# Altium PCB UKU202045.PcbDoc (part 3 of 3)
Units mm, origin at the board's own origin, x right, y up, seen from the top; angles counter-clockwise.
Board outline 319.2 x 161.95 mm, 2 copper layers (Top Layer, Bottom Layer); 290 components, 381 nets, 912 pads, 545 vias.
Unrouted connection lines stored in the file: 1.
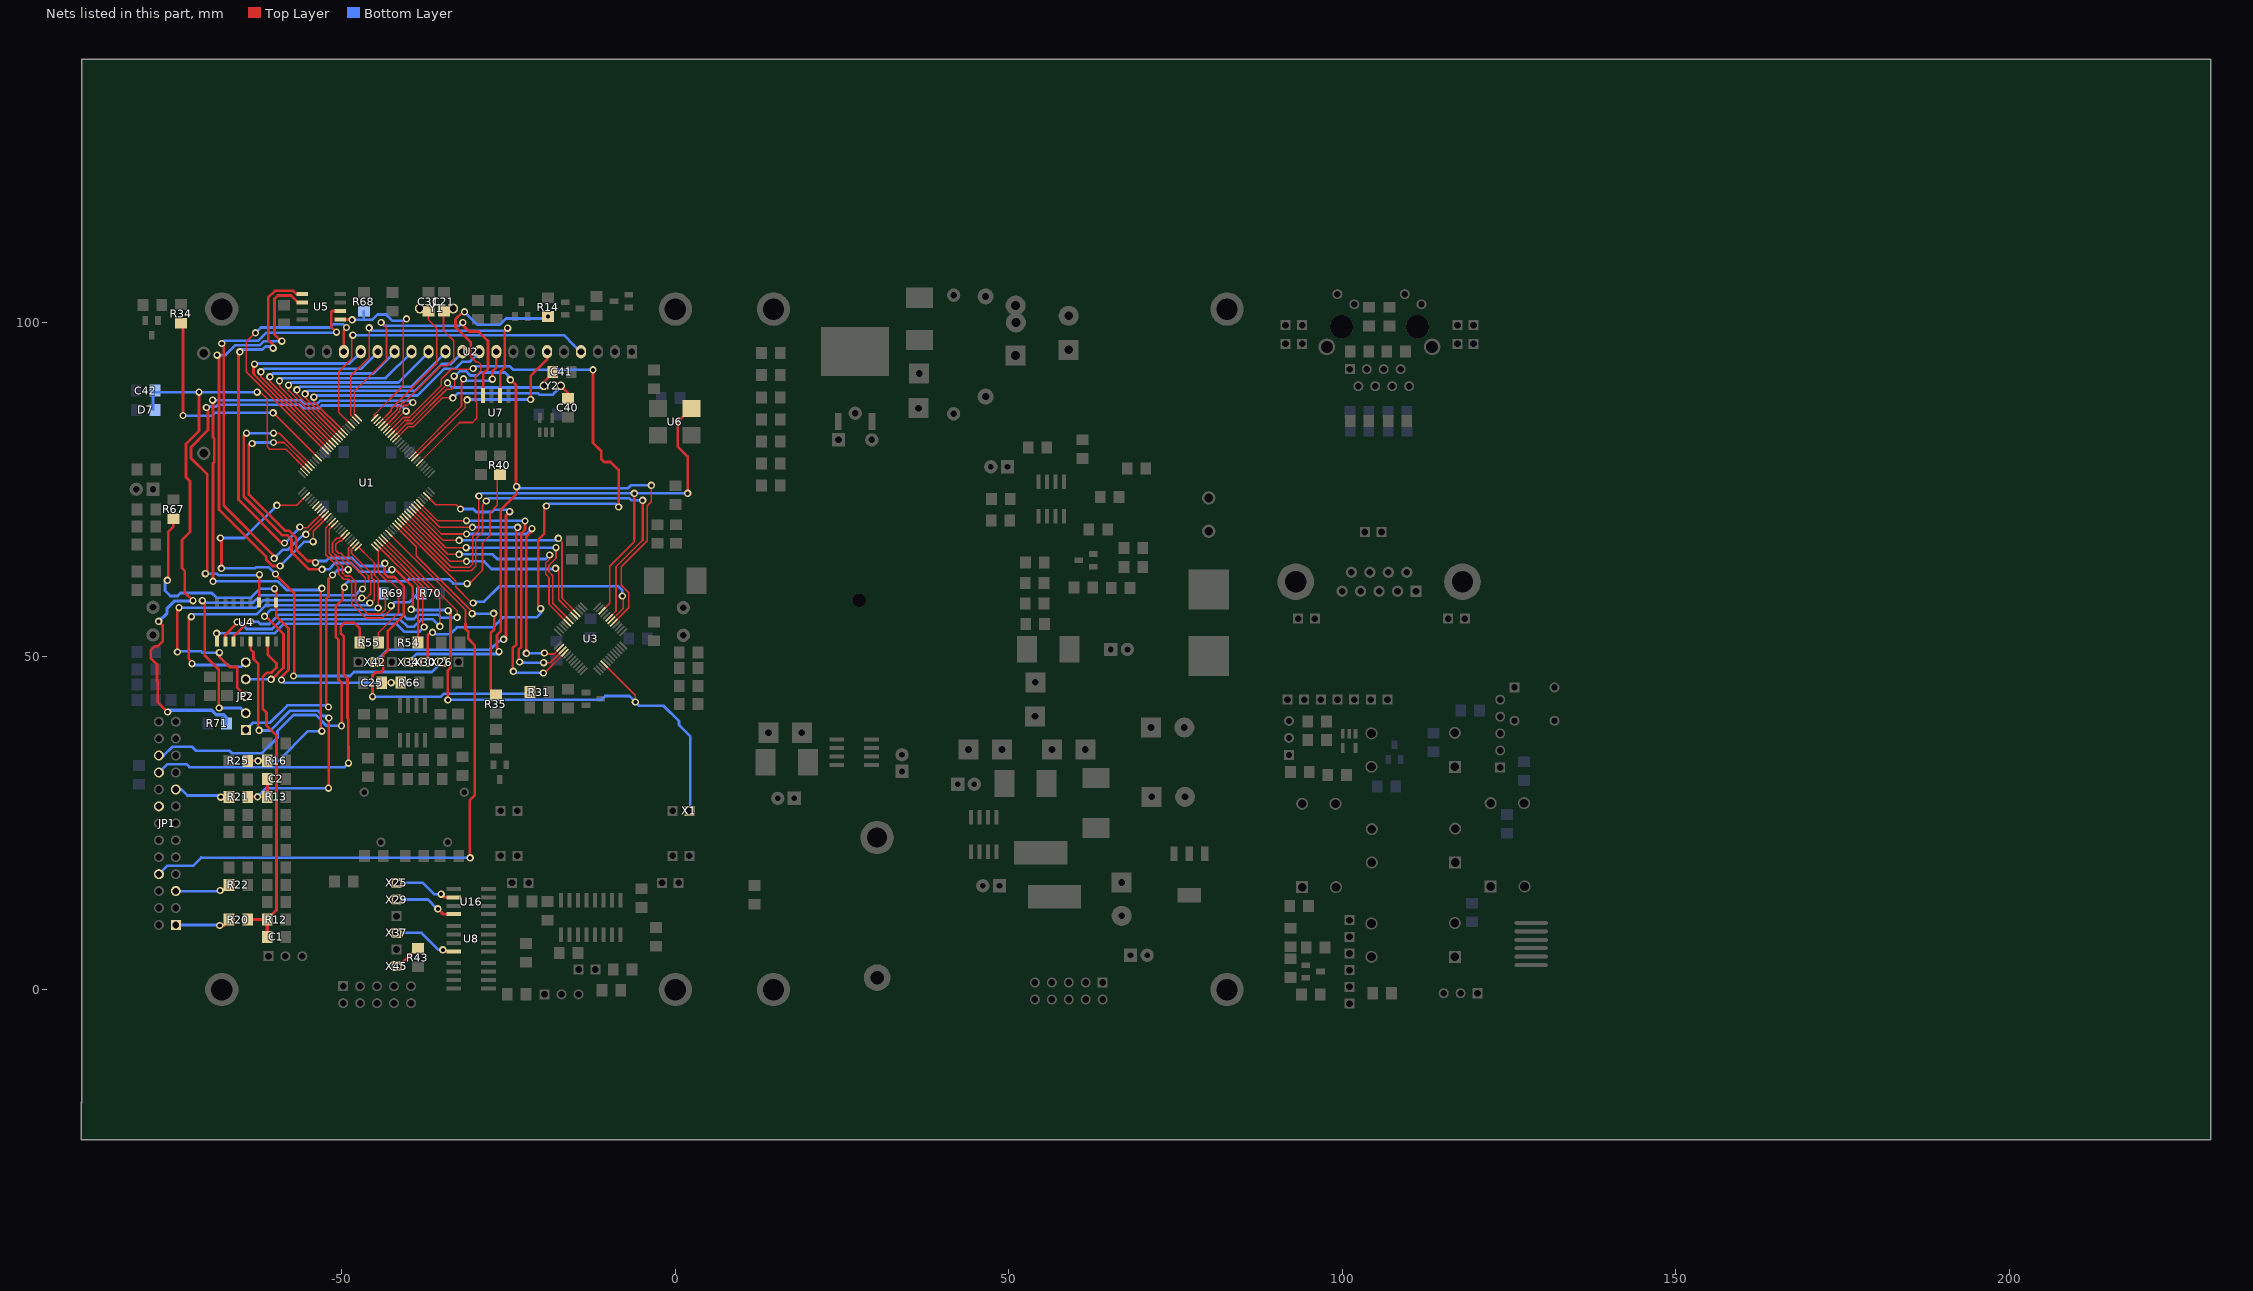
[diagram p3: the nets of this part, all layers, seen from the top]

## Via types
v1: diameter 1.1, hole 0.6, Top Layer to Bottom Layer, 521 vias
v2: diameter 1.2, hole 0.7, Top Layer to Bottom Layer, 12 vias
v3: diameter 1.5, hole 0.95, Top Layer to Bottom Layer, 12 vias

## Nets (pads, with @x,y where several pads share a name; then routed paths per layer and width w, separated by ;. In a path a pad name is that pad's centre, name@x,y a point inside that pad or via, vN(x,y) a via of type N, cw(c..) or ccw(c..) an arc to the next point about the centre after c; other vN are vias at no path point) (continued)
OFF2: JP1.20 R55.2 | length 55.9
  Top Layer w0.4: v1(-49,33.95) -49,36.5 -49.05,36.55 -49.05,40.6 -49.15,40.7 -49.15,46.6 -49.7,47.15 -49.7,52.9 -50.15,53.35 -50.15,54.45 -49.6,55 -48.15,55 -47.291,54.141 R55.2@-47.291,52.004
  Bottom Layer w0.4: JP1.20@-77.42,32.545 -76.165,33.8 -73.3,33.8 -72.85,33.35 -49.6,33.35 v1(-49,33.95)
P0_0: 
P0_0: U1.46 U3.16 X1.1 | length 135.4
  Top Layer w0.25: v1(-60.25,83.4) -59.357,83.4 U1.46@-54.608,78.652 ; U3.16@-10.643,48.751 -6,44.108 v1(-6,43.1)
  Top Layer w0.4: v1(-64.3,83.4) -64.7,83 -64.7,73.9 -58.9,68.1 -58.15,68.1 -57.55,67.5 -57.55,65.6 -54.95,63 v1(-52.95,63) ; -57.397,65.448 -57.393,65.444 ; v1(-42.5,62.95) -41.95,62.95 -39.35,60.35 -39.35,57.4 -39.5,57.25 v1@-39.6,57.25 ; v1(-34.1,43.4) -34.1,47.85 -33.7,48.25 -33.7,56.45 v1(-34.05,56.8)
  Bottom Layer w0.4: v1(-64.3,83.4) v1(-60.25,83.4) ; v1(-52.95,63) -51.95,63 -51,63.95 -48.65,63.95 -47.35,62.65 -42.8,62.65 v1(-42.5,62.95) ; v1@-39.6,57.25 -39.475,57.125 -39.25,56.9 -34.15,56.9 v1(-34.05,56.8) ; v1(-34.1,43.4) -34.05,43.45 -11.05,43.45 -10.5,44 -6.9,44 v1(-6,43.1) -5.45,42.55 -1.75,42.55 0.55,40.25 0.55,39.65 2.25,37.95 2.25,27.05 2.05,26.85 X1.1@2,26.8
  other v1: -39.6,57
P0_1: R31.2 U1.47 | length 92.7
  Top Layer w0.25: v1(-60.25,82) -58.664,82 U1.47@-54.962,78.298
  Top Layer w0.4: v1@-63.75,81.85 -63.95,81.65 -63.95,74.2 -58.55,68.8 -57.9,68.8 -56.85,67.75 -56.85,65.95 -55.15,64.25 -54.2,64.25 v1(-53.95,64) ; v1(-45.4,43.9) -45.4,47.1 -44.95,47.55 -44.15,47.55 -43.8,47.9 -43.8,50.15 -43.1,50.85 -43.1,53.75 -40.7,56.15 -40.7,60.45 -42.1,61.85 -43.05,61.85 -43.599,62.399 -43.599,63.851 v1(-43.55,63.9)
  Bottom Layer w0.4: v1@-63.75,81.85 -63.6,82 -63.45,82 v1(-60.25,82) ; v1(-53.95,64) -53.7,64.25 -52.35,64.25 -51.9,64.7 -48.45,64.7 -47.25,63.5 -43.95,63.5 v1(-43.55,63.9) ; v1(-45.4,43.9) -35.15,43.9 -34.7,44.35 -22.1,44.35 v1(-21.9,44.55)
  other v1: -63.45,81.85
P0_2: U1.98 X42.1 | length 53.9
  Top Layer w0.25: U1.98@-37.25,74.05 -35.9,72.7 -32.85,72.7 v1(-32.2,72.05)
  Top Layer w0.4: v1(-25.75,52.5) -25.4,52.85 -25.4,71.1 v1(-24.85,71.65)
  Bottom Layer w0.4: X42.1@-45,49.1 -43.15,50.95 -27.75,50.95 -26.45,52.25 -26.3,52.25 -26.05,52.5 v1(-25.75,52.5) ; v1(-32.2,72.05) -30.3,72.05 -29.85,71.6 -27.5,71.6 -27.15,71.95 -25.15,71.95 v1(-24.85,71.65)
P0_3: U1.99 X22.1 | length 47.5
  Top Layer w0.25: U1.99@-36.931,74.409 -35.722,73.2 v1(-30.9,73.2)
  Top Layer w0.4: v1(-25.5,49.05) -25.25,49.3 -25.25,51.5 -24.65,52.1 -24.65,70.4 v1(-22.45,72.6)
  Bottom Layer w0.4: v1(-30.9,73.2) -30.35,73.2 -29.35,72.2 -27.85,72.2 -27.35,72.7 -22.55,72.7 v1(-22.45,72.6)
  Bottom Layer w0.5: X22.1@-32.5,49.1 -25.55,49.1 v1(-25.5,49.05)
P0_3: 
P0_4: 
P0_5: U1.80 U4.11 | length 53
  Top Layer w0.25: U1.80@-43.648,67.691 -33.253,57.297 ; -33.25,57.3 -32.7,56.75 v1(-32.7,55.8)
  Top Layer w0.4: U4.11@-66.205,52.175 -66.205,52.945 -64.2,54.95 -63.899,54.95 v1(-63.699,55.15)
  Bottom Layer w0.4: v1(-63.699,55.15) -62.6,55.15 -62.25,54.8 -60.85,54.8 -59.45,56.2 -40.85,56.2 -40.2,55.55 -39.2,55.55 -38.55,56.2 -35.6,56.2 -35.15,55.75 v1@-32.8,55.75
P0_6: U1.79 U4.10 | length 52.9
  Top Layer w0.25: U1.79@-43.966,67.338 -35.3,58.671 v1(-35.3,54.45)
  Top Layer w0.4: U4.10@-67.475,52.175 -67.475,53.175 -65.7,54.95 v1(-65.7,55.1)
  Bottom Layer w0.4: v1(-65.7,55.1) -65.3,55.1 -64.25,54.05 ; -64.25,54.05 -60.45,54.05 -59,55.5 -41.25,55.5 -40.15,54.4 -39.15,54.4 -38.05,55.5 -36.35,55.5 v1(-35.3,54.45)
P0_7: U1.78 U4.9 | length 49.2
  Top Layer w0.25: U1.78@-44.355,66.984 -37.85,60.479 -37.85,54.55 v1(-37.65,54.35)
  Top Layer w0.4: U4.9@-68.75,52.1 -68.75,52.175 v1(-68.75,53.4)
  Bottom Layer w0.4: v1(-68.75,53.4) -60.1,53.4 -58.65,54.85 -41.85,54.85 -40.65,53.65 -38.35,53.65 v1(-37.65,54.35)
P0_8: R54.1 U1.77 | length 17.2
  Top Layer w0.25: U1.77@-44.709,66.631 -38.591,60.513 R54.1@-38.591,52.004
P0_9: R55.1 U1.76 | length 17.4
  Top Layer w0.25: U1.76@-45.062,66.277 -44.55,65.765 -44.55,62.55 -43.196,61.196 -42.696,61.196 -41.5,60 -41.5,56.5 -44.55,53.45 -44.55,52.004 R55.1@-44.55,51.95
P0_10: C42.1 D7.2 R71.2 U1.48 | length 101.2
  Top Layer w0.25: v1(-62.7,89.55) -62.2,89.55 -61.2,88.55 -61.2,81.4 -60.8,81 -58.371,81 U1.48@-55.315,77.944
  Top Layer w0.4: v1(-77.45,55.2) -76.85,54.6 -76.85,52.2 -77.6,51.45 -78.05,51.45 -78.65,50.85 -78.65,49.7 -77.7,48.75 -77.7,46.3 -77.6,46.2 -77.6,43.1 v1(-76.1,41.6) ; v1(-72.3,58.3) -73.55,59.55 -73.55,62.8 -73.95,63.2 -73.95,67.4 -72.75,68.6 -72.75,76.2 -73.35,76.8 -73.35,81.8 -71.4,83.75 v1(-71.4,89.55)
  Bottom Layer w0.4: D7.2@-78.25,86.95 -78.3,87 -78.3,89.6 -78.253,89.553 -78.25,89.55 -78.003,89.55 v1(-71.4,89.55) v1(-62.7,89.55)
  Bottom Layer w0.5: v1(-77.45,55.2) -76.2,56.45 -76.2,57.2 -75.15,58.25 -72.35,58.25 v1(-72.3,58.3) ; v1(-76.1,41.6) -75.85,41.85 -69.5,41.85 -68.85,41.2 -67.7,41.2 -67.297,40.797 R71.2@-67.297,39.897
P0_11: U1.49
P0_12: 
P0_13: 
P0_14: 
P0_15: U1.62 U5.6 | length 69.7
  Top Layer w0.25: v1(-54.3,67.15) -54.3,68.7 U1.62@-52.13,70.87
  Top Layer w0.4: v1(-68.7,95.1) -68.4,94.8 -68.4,85.25 ; -68.45,85.25 -68.4,85.25 ; -60.1,98.2 -59.1,97.2 -59.05,97.2 -59.05,97.15 -59.025,97.175 v1(-59,97.2) ; -60.1,98.25 -60.1,103.55 -59.6,104.05 -57.6,104.05 -56.535,102.985 U5.6@-55.95,102.985 U5.6@-56.015,103.05 ; v1(-59.25,63.5) -60.4,63.5 -61.35,64.45 -61.35,64.9 -64.065,67.615 -68.4,71.95 -68.4,85.25
  Bottom Layer w0.4: v1(-68.7,95.1) -67.45,95.1 -65.95,96.6 -62.3,96.6 -61.7,97.2 v1(-59,97.2) ; v1(-59.25,63.5) -55.6,67.15 v1(-54.3,67.15)
P0_17: U1.61 U5.2 | length 68.5
  Top Layer w0.25: v1(-55.4,68.25) -55.4,68.3 U1.61@-52.5,71.2
  Top Layer w0.4: v1@-67.7,96.95 -67.7,96.85 -67.7,72.55 -60.15,65 v1(-60.15,64.65) ; v1(-50.8,98.55) -51.6,99.35 -51.6,101.6 -51.485,101.715 U5.2@-50.25,101.715
  Bottom Layer w0.4: v1@-68,96.9 -67.65,97.25 -62.55,97.25 -61.35,98.45 -50.9,98.45 v1(-50.8,98.55) ; v1(-60.15,64.65) -58.85,65.95 -58.05,65.95 -55.75,68.25 v1(-55.4,68.25)
  other v1: -68,96.85
P0_18: U1.60 U5.5 | length 59
  Top Layer w0.25: v1@-56.25,69.25 -55.15,69.25 -54.8,69.6 U1.60@-52.83,71.57
  Top Layer w0.4: v1(-65.3,95.6) -65.5,95.4 -65.5,73.45 -58.95,66.9 -58.6,66.9 -58.55,66.9 v1(-58.6,66.95) ; -60.45,96.8 -60.647,96.997 ; v1(-60.3,96.15) -60.3,96.65 -60.647,96.997 ; U5.5@-55.95,104.255 -56.805,104.255 -57.3,104.75 -60.05,104.75 -61.05,103.75 -61.05,97.4 -60.647,96.997
  Bottom Layer w0.4: v1(-65.3,95.6) -64.95,95.95 -61.9,95.95 -61.45,96.4 -60.55,96.4 v1(-60.3,96.15) ; v1(-58.6,66.95) -58.55,66.95 v1@-56.25,69.25
  other v1: -56.3,69.35
P0_19: U1.59
P0_20: U1.58
P0_21: U1.57
P0_22: 
P0_22: 
P0_23: U1.9 U2.9 | length 23.7
  Top Layer w0.25: U1.9@-39.406,80.066 -32.05,87.422 -32.05,91.45 v1@-31.95,91.55
  Top Layer w0.4: v1(-27.45,91.5) -27.45,92.65 -26.843,93.257 U2.9@-26.843,95.631
  Bottom Layer w0.4: v1@-31.95,91.55 -31.85,91.45 -31.65,91.25 -27.7,91.25 v1(-27.45,91.5)
  other v1: -31.75,91.55
P0_24: U1.8 U2.6 | length 29.7
  Top Layer w0.25: U1.8@-39.052,79.712 -31.5,87.264 -31.5,88.1 v1(-31.2,88.4)
  Top Layer w0.4: v1(-21.7,88.45) -21.7,92 -19.223,94.477 U2.6@-19.223,95.631
  Bottom Layer w0.4: v1(-31.2,88.4) -31.15,88.45 v1(-21.7,88.45)
P0_25: C3.1 R15.1 R22.1 U1.7 | length 140.3
  Top Layer w0.25: U1.7@-38.698,79.359 -31.907,86.15 v1(-30.95,86.15)
  Top Layer w0.4: -73.8,51.5 -73.8,51.55 ; v1(-72.75,83.75) -74.25,82.25 -74.25,76.6 -73.55,75.9 -73.55,69.1 -74.65,68 -74.65,62.95 -74.3,62.6 -74.3,59 -73.2,57.9 -73.2,56.8 -73.8,56.2 -73.8,51.55 ; C3.1@-61.2,13.15 -61.197,13.153 R15.1@-61.197,15.703 -61.2,15.7 -64,15.7 -64.053,15.647 -66.05,13.65 -68.75,13.65 -69.4,14.3 -69.4,24.55 -69.2,24.75 -69.2,26.6 -69.45,26.85 -69.45,38.85 -73.45,42.85 -73.45,48.4 -73.65,48.6 -73.65,51.4 -73.775,51.525 -73.8,51.55
  Bottom Layer w0.4: v1(-72.75,83.75) -72,84.5 -68.95,84.5 -68.4,85.05 -61.75,85.05 -61.25,84.55 -59.6,84.55 -58.35,85.8 -52.65,85.8 -52.4,86.05 -42.45,86.05 -41.25,84.85 -39.4,84.85 -38.15,86.1 -31,86.1 v1(-30.95,86.15)
P0_25: 
P0_26: R14.1 U1.6 | length 44
  Top Layer w0.25: U1.6@-38.35,79 U1.6@-38.345,79.005 -32.35,85 -30.4,85 -29.75,85.65 -29.75,88 -29.95,88.2 -29.95,91.95 -29.15,92.75 -29.15,93.7 -29.5,94.05 -29.85,94.05 -30.65,94.85 -30.65,96.5
  Top Layer w0.4: v1(-31.6,101.6) -31.85,101.6 -32.95,100.5 -32.95,99.3 -30.65,97 -30.65,96.5
  Bottom Layer w0.4: v1(-31.6,101.6) -29.65,99.65 -26.35,99.65 -25.4,100.6 -19.381,100.6 v1(-19.093,100.888)
P0_27: 
P0_27: R68.1 U1.25 U5.1 | length 29
  Top Layer w0.25: U1.25@-45.1,85.65 -45.1,85.723 -45.1,86.2 -40.8,90.5 -40.8,100.05 v1(-40.3,100.55)
  Top Layer w0.4: U5.1@-50.25,100.445 -48.495,100.445 v1(-48.45,100.4)
  Bottom Layer w0.4: v1(-48.45,100.4) -46.7,100.4 ; R68.1@-46.697,101.703 -46.7,101.7 -46.7,100.4 ; v1(-40.3,100.55) -40.6,100.25 -42.4,100.25 -43.35,101.2 -44.65,101.2 -45.45,100.4 -46.7,100.4
P0_28: U1.24
P0_29: U1.29 U2.4 | length 50.4
  Top Layer w0.25: U1.29@-48.598,84.662 -50.45,86.514 -50.45,92.6 -48.5,94.55 -48.5,97.95 v1(-48.35,98.1)
  Bottom Layer w0.4: v1(-48.35,98.1) -16.7,98.1 -15.259,96.659 -15.25,96.65 ; -15.265,96.653 -14.193,95.581 U2.4@-14.143,95.531
P0_30: U1.30 U2.5 | length 49.2
  Top Layer w0.25: v1(-51,97.1) -51,86.357 U1.30@-48.951,84.309
  Bottom Layer w0.4: v1(-51,97.1) v1@-50.986,97.087 ; v1@-50.95,97.05 v1@-50.986,97.087 ; U2.5@-16.683,95.531 -16.733,95.581 -18.502,97.35 -47.4,97.35 -47.7,97.05 -49,97.05 -49.4,97.45 -50.623,97.45 v1@-50.986,97.087
P0_30: 
P1_0: U1.95 U3.3 | length 45.8
  Top Layer w0.25: U1.95@-38.345,72.995 -35.65,70.3 v1@-31.35,70.3 ; v1(-19.75,49) -18.773,49 U3.3@-16.901,50.872 U3.3@-16.9,50.873
  Top Layer w0.4: v1(-23.35,49.1) -23.5,49.25 -23.5,50.95 -23.1,51.35 -23.1,68.4 -22.55,68.95 v1(-22.55,70.25)
  Bottom Layer w0.4: v1@-31.35,70.3 v1(-31.3,70.3) -22.6,70.3 v1(-22.55,70.25) ; v1(-23.35,49.1) -23.25,49 v1(-19.75,49)
P1_1: U1.94 U3.4 | length 47.7
  Top Layer w0.25: U1.94@-38.65,72.65 -38.659,72.641 U1.94@-38.663,72.641 -35.322,69.3 v1(-30.4,69.3) ; v1@-24.4,47.8 v1(-24.3,47.7) ; v1(-19.8,47.45) -19.8,47.4 -19.666,47.4 U3.4@-16.547,50.519
  Top Layer w0.4: v1@-24.4,47.8 -24.4,51.2 -23.85,51.75 -23.85,69.1 v1(-23.65,69.3)
  Bottom Layer w0.4: v1(-30.4,69.3) v1(-23.65,69.3) ; v1(-24.3,47.7) -24.3,47.5 -19.85,47.5 v1(-19.8,47.45)
P1_2: 
P1_2: 
P1_3: 
P1_3: 
P1_4: U1.93 U3.2 | length 44.1
  Top Layer w0.25: U1.93@-39.052,72.288 -35.064,68.3 v1(-31.3,68.3) ; v1(-19.65,50.45) -19.5,50.3 -18.18,50.3 U3.2@-17.254,51.226
  Top Layer w0.4: v1(-22.35,50.4) -22.35,67.95 -21.6,68.7 -21.5,68.8 v1(-21.5,69.1)
  Bottom Layer w0.4: v1(-31.3,68.3) -22.3,68.3 v1(-21.5,69.1) ; v1(-22.35,50.4) -19.7,50.4 v1(-19.65,50.45)
P1_5: 
P1_5: 
P1_5: 
P1_6: 
P1_6: 
P1_6: 
P1_7: 
P1_7: 
P1_7: 
P1_8: U1.92 U3.40 | length 36.3
  Top Layer w0.25: U1.92@-39.406,71.934 -34.821,67.35 v1(-32.4,67.35) ; v1(-17.55,67.65) -17,67.1 -17,58.65 -16.75,58.4 ; -16.753,58.397 U3.40@-14.78,56.423
  Bottom Layer w0.4: v1(-32.4,67.35) -17.85,67.35 v1(-17.55,67.65)
P1_9: U1.91 U3.43 | length 36.7
  Top Layer w0.25: U1.91@-39.759,71.581 -34.428,66.25 v1(-31.35,66.25) ; v1(-17.9,66.25) -17.9,64.65 -18.95,63.6 -18.95,62.6 -18.387,62.037 -18.387,57.91 U3.43@-15.84,55.363
  Bottom Layer w0.4: v1(-31.35,66.25) v1(-17.9,66.25)
P1_10: U1.90 U3.44 | length 36.1
  Top Layer w0.25: U1.90@-40.113,71.227 -34.136,65.25 v1(-32.4,65.25) ; v1(-18.85,65.15) -18.85,64.55 -19.45,63.95 -19.45,62.3 -18.933,61.783 -18.933,57.748 U3.44@-16.194,55.009
  Bottom Layer w0.4: v1@-32.45,65.25 v1(-32.4,65.25) -27.4,65.25 -26.7,64.55 -19.45,64.55 v1(-18.85,65.15)
P1_11: 
P1_11: 
P1_12: 
P1_12: 
P1_14: U1.89 U3.41 | length 34.1
  Top Layer w0.25: U1.89@-40.466,70.873 -33.793,64.2 v1(-31.3,64.2) ; v1@-17.9,63.15 -17.5,62.75 -17.5,58.436 U3.41@-15.133,56.07
  Bottom Layer w0.4: v1(-31.3,64.2) -28.7,64.2 -27.55,63.05 -18,63.05 -17.925,63.125 v1@-17.9,63.15
  other v1: -17.95,63.15
P1_15: U1.88 U3.34 U6.3 | length 89.3
  Top Layer w0.25: U1.88@-40.82,70.52 -33.6,63.3 -30.85,63.3 -30.35,63.8 -30.35,67.95 -29.45,68.85 v1(-29.45,74) ; U3.34@-10.997,56.777 -9.85,57.923 -9.85,63.45 -6.15,67.15 -6.15,67.55
  Top Layer w0.4: -6.15,67.55 v1(-6.15,74.4) ; v1(1.85,74.4) 1.85,79.9 0.35,81.4 0.35,85.1 U6.3@2.25,87
  Bottom Layer w0.4: v1(-29.45,74) -29.05,74.4 v1(-6.15,74.4) v1(1.85,74.4)
P1_16: U1.87 U3.31 | length 68.5
  Top Layer w0.25: U1.87@-41.173,70.166 -33.807,62.8 -30.6,62.8 -29.9,63.5 -29.9,67.55 -28.9,68.55 -28.9,72.7 v1(-28.35,73.25) ; U3.31@-9.936,55.716 -8.9,56.752 -8.9,63.4 -4.9,67.4
  Top Layer w0.4: -4.9,67.4 v1(-4.9,73.35)
  Bottom Layer w0.4: v1(-28.35,73.25) -27.95,73.65 -6.9,73.65 -6.6,73.35 v1(-4.9,73.35)
P1_17: U1.86 U3.30 | length 45.4
  Top Layer w0.25: U1.86@-41.527,69.813 -32.914,61.2 -32.914,60.364 -30.55,58 v1@-30.35,58 ; U3.30@-9.582,55.363 -8.047,56.898 ; -8.05,56.9 -7.8,57.15 -7.8,58.85 v1(-7.95,59)
  Bottom Layer w0.4: v1@-30.3,58.15 -28.7,58.15 -26.4,60.45 -8.55,60.45 -7.95,59.85 v1(-7.95,59)
  other v1: -30.3,57.95
P1_18: U1.32 U2.10 | length 34.7
  Top Layer w0.25: v1(-54.2,88.8) -54.2,88.143 U1.32@-49.659,83.601
  Bottom Layer w0.4: v1(-54.2,88.8) -53.95,89.05 -38.65,89.05 -34.65,93.05 -33,93.05 -31.914,94.136 -30.778,94.136 U2.10@-29.383,95.531
P1_19: U1.33 U2.11 | length 34.5
  Top Layer w0.25: v1(-55.5,89.3) -55.5,88.736 U1.33@-50.012,83.248
  Bottom Layer w0.4: v1(-55.5,89.3) -55.05,89.75 -39.05,89.75 -35.015,93.785 -33.669,93.785 U2.11@-31.923,95.531
P1_20: U1.34 U2.12 | length 34.3
  Top Layer w0.25: v1(-56.75,89.9) -56.75,89.278 U1.34@-50.366,82.894
  Bottom Layer w0.4: v1(-56.75,89.9) -56.3,90.35 -39.644,90.35 U2.12@-34.463,95.531
P1_21: U1.35 U2.13 | length 34.2
  Top Layer w0.25: v1(-58,90.6) -58,89.75 -57.928,89.75 U1.35@-50.719,82.541
  Bottom Layer w0.4: v1(-58,90.6) -57.6,91 -41.534,91 U2.13@-37.003,95.531
P1_22: U1.36 U2.14 | length 34.1
  Top Layer w0.25: v1(-59.35,91.25) -59.35,90.45 -51.087,82.187 U1.36@-51.073,82.187
  Bottom Layer w0.4: v1(-59.35,91.25) -58.95,91.65 -43.424,91.65 U2.14@-39.543,95.531
P1_23: 
P1_23: U1.37 U2.15 | length 34.1
  Top Layer w0.25: v1(-60.8,91.85) -60.8,91.2 -51.433,81.834 U1.37@-51.426,81.834
  Bottom Layer w0.4: v1(-60.8,91.85) -60.3,92.35 -45.264,92.35 U2.15@-42.083,95.531
P1_24: U1.38 U2.16 | length 34.2
  Top Layer w0.25: v1(-62.15,92.6) -62.15,91.85 U1.38@-51.78,81.48
  Bottom Layer w0.4: v1(-62.15,92.6) -61.7,93.05 -47.104,93.05 U2.16@-44.623,95.531
P1_25: U1.39 U2.17 | length 34.4
  Top Layer w0.25: -63.15,92.25 -63.15,92.15 -52.13,81.13 U1.39@-52.1,81.1
  Top Layer w0.4: v1@-63.25,94.05 -63.25,93.75 -63.25,92.35 -63.15,92.25
  Bottom Layer w0.4: v1@-63.25,94.05 -63.05,93.85 -48.844,93.85 U2.17@-47.163,95.531
  other v1: -63.1,93.75
P1_26: U1.40 U2.18 | length 41.5
  Top Layer w0.25: v1(-62.95,98.45) -63,98.45 -64.35,97.1 -64.35,92.636 U1.40@-52.487,80.773
  Top Layer w0.4: U2.18@-49.7,95.55 -49.7,95.631 -49.7,98.85 v1(-49.3,99.25)
  Bottom Layer w0.4: v1(-62.95,98.45) -62.15,99.25 -51.8,99.25 -51.3,99.75 -49.85,99.75 -49.35,99.25 v1(-49.3,99.25)
P1_27: R34.1 U1.43 | length 37.1
  Top Layer w0.25: v1(-60.3,86.45) -60.285,86.45 U1.43@-53.548,79.712
  Top Layer w0.4: v1(-73.8,86.05) R34.1@-73.8,99.9
  Bottom Layer w0.4: v1(-73.8,86.05) -73.75,86 -69.45,86 -69,86.45 v1(-60.3,86.45)
P1_28: 
P1_29: 
P1_30: R16.1 R25.1 U1.21 | length 116.5
  Top Layer w0.25: U1.21@-43.65,84.35 -43.65,84.31 U1.21@-43.648,84.309 -41.778,86.178 ; -41.8,86.2 -41.3,86.7 -41.3,87.05 -40.8,87.55 -40.2,87.55 -39.75,88 v1(-39.35,88)
  Top Layer w0.4: v1(-69.35,88.35) -69.3,88.3 -69.3,82.8 -69.1,82.6 -69.1,79.1 -69.3,78.9 v1(-69.3,61.2) ; R25.1@-63.803,34.297 v1(-62.55,34.297) -61.203,34.297 R16.1@-61.197,34.303 R16.1@-61.1,34.4 ; v1(-53,38.75) -53.15,38.9 -53.15,60 v1(-53,60.15)
  Bottom Layer w0.4: v1(-69.35,88.35) -56.15,88.35 -55.6,87.8 -53.7,87.8 -53.25,88.25 -39.6,88.25 v1(-39.35,88) ; v1(-69.3,61.2) -59.6,61.2 -58.3,59.9 -53.25,59.9 v1(-53,60.15) ; v1(-62.55,34.297) -59.503,34.297 -55.05,38.75 v1(-53,38.75)
P1_31: U1.20 U4.3 | length 74.9
  Top Layer w0.25: U1.20@-43.295,83.955 -40.6,86.65 -40.35,86.65 v1@-40.3,86.65
  Top Layer w0.4: v1(-70.45,62.35) -70.15,62.65 -70.15,77.2 -72.6,79.65 -72.6,81.3 -70.05,83.85 -70.05,87 v1(-70.3,87.25) ; U4.3@-62.395,58.025 -62.395,62.155 v1(-62.35,62.2)
  Bottom Layer w0.4: v1(-70.45,62.35) -68.75,62.35 -68.5,62.1 -62.45,62.1 v1(-62.35,62.2) ; v1(-70.3,87.25) -70.15,87.4 -68.85,87.4 -68.6,87.65 -56.3,87.65 -55.8,87.15 -53.4,87.15 -53,87.55 -41.1,87.55 -40.3,86.75 -40.2,86.65 v1@-40.3,86.65
  other v1: -40.35,86.7
P2_0: JP2.4 U1.75 | length 43.3
  Top Layer w0.25: U1.75@-47.45,66.3 -45.631,64.482 -45.1,63.95 -45.1,62.1 -44.55,61.55 v1(-44.55,57.2)
  Top Layer w0.4: v1(-61.6,55.95) -61.6,55.9 -61.35,55.9 -58.75,53.3 -58.75,48.25 -60.5,46.5 v1(-60.6,46.5)
  Bottom Layer w0.4: JP2.4@-64.4,46.52 -60.62,46.52 v1(-60.6,46.5) ; v1(-61.6,55.95) -60.6,56.95 -44.8,56.95 v1(-44.55,57.2)
P2_1: JP2.5 U1.74 | length 54.3
  Top Layer w0.25: U1.74@-47.891,66.631 -48.55,65.972 -48.55,65.4 -47.36,64.211 -45.55,62.4 -45.55,61.75 -45.15,61.35 -45.15,58.45 v1@-45.65,57.95
  Top Layer w0.4: v1@-72.7,56 -72.95,55.75 -72.95,49.6 -72.325,48.975 v1@-72.25,48.9
  Bottom Layer w0.4: v1@-72.7,56 -72.675,56.025 -72.45,56.25 -62.8,56.25 -61.45,57.6 -47.5,57.6 -46.1,57.6 -45.825,57.875 v1@-45.8,57.9 ; v1(-72.45,48.85) -72.25,48.65 -67.05,48.65 -66.8,48.4 -65.06,48.4 JP2.5@-64.4,49.06
  other v1: -72.55,55.9 -45.8,57.95
P2_2: JP2.3 U1.73 | length 60.9
  Top Layer w0.25: U1.73@-48.244,66.984 -49,66.229 -49,65 -46,62 -46,61.5 -45.65,61.15 -45.65,59.35 -46.3,58.7 v1(-47,58.7)
  Top Layer w0.4: v1(-74.65,50.6) -74.65,57 v1(-74.4,57.25) ; v1(-68.35,50.5) -68.35,49.85 -66.85,48.35 -65.85,48.35 -65.7,48.2 -65.7,45.28 JP2.3@-64.4,43.98
  Bottom Layer w0.4: v1(-74.65,50.6) -74.55,50.7 -71.1,50.7 -70.9,50.5 v1(-68.35,50.5) ; v1(-74.4,57.25) -62.9,57.25 -61.8,58.35 -47.35,58.35 v1(-47,58.7)
P2_3: JP2.2 U1.70 | length 57.4
  Top Layer w0.25: U1.70@-49.305,68.045 -50.1,67.25 -50.4,67.25 -50.9,66.75 -50.9,65.85 -50.443,65.394 -50.143,65.394 -46.5,61.75 -46.5,60.45 v1(-46.9,60.05)
  Top Layer w0.4: v1(-70.9,58.3) -70.55,57.95 -70.55,50.1 -68.45,48 -68.45,42.25 v1(-68.4,42.2)
  Bottom Layer w0.4: v1(-70.9,58.3) -70.6,58 -63.3,58 -62.2,59.1 -49.35,59.1 -48.05,59.1 -47.1,60.05 v1(-46.9,60.05) ; v1(-68.4,42.2) -65.16,42.2 JP2.2@-64.4,41.44
P2_4: JP2.1 U1.69 | length 44.5
  Top Layer w0.25: U1.69@-49.659,68.399 -50.407,67.65 -50.75,67.65 -51.4,67 -51.4,65.6 -50.75,64.95 -50.5,64.95 -50.323,64.773 -49.05,63.5 v1(-49.05,62.95)
  Top Layer w0.4: v1(-52,42.35) -52.35,42.7 -52.35,58.55 -52,58.9 -52,61.55 v1(-51.4,62.15)
  Bottom Layer w0.4: JP2.1@-64.4,38.9 -63.3,40 -60.75,40 -58.15,42.6 -52.25,42.6 v1(-52,42.35) ; v1(-51.4,62.15) -50.6,62.95 v1(-49.05,62.95)
P2_8: R69.1 U1.65 | length 22.3
  Top Layer w0.25: U1.65@-51.073,69.813 -51.9,68.986 -51.9,65.4 -49.95,63.45 -49.95,62.5 -49.45,62 -48.75,62 -47.95,61.2 -47.95,58.15 -46.1,56.3 -44.15,56.3 -43.5,56.95 v1(-43.5,59.4)
  Bottom Layer w0.4: R69.1@-43.797,59.397 -43.503,59.397 v1(-43.5,59.4)
P2_9: R70.1 U1.64 | length 27.9
  Top Layer w0.25: U1.64@-51.426,70.166 -52.4,69.193 -52.4,65.2 -50.5,63.3 -50.5,62.3 -49.7,61.5 -48.95,61.5 -48.5,61.05 -48.5,57.8 -46.4,55.7 -43.95,55.7 -42.6,57.05 v1(-42.6,57.55)
  Bottom Layer w0.4: v1(-42.6,57.55) -42.1,58.05 -39.9,58.05 -38.553,59.397 R70.1@-38.097,59.397
P2_10: U1.53 X26.1 | length 68.3
  Top Layer w0.25: v1(-59.75,72.6) -56.771,72.6 U1.53@-55.315,74.055
  Top Layer w0.4: v1(-68.2,67.7) -68.05,67.55 v1(-68.05,63.15) ; v1(-59.95,62.3) -59.95,62.25 -57.15,59.45 -57.15,47.1 v1(-57.25,47)
  Bottom Layer w0.4: v1(-68.2,67.7) -64.65,67.7 v1(-59.75,72.6) ; v1(-68.05,63.15) -63,63.15 -62.85,63.3 -60.95,63.3 v1(-59.95,62.3) ; v1(-57.25,47) -48.75,47 -48.15,47.6 -36.5,47.6 X26.1@-35,49.1
P3_25: U1.27 U7.2 | length 47
  Top Layer w0.25: U1.27@-47.891,85.369 -48.65,86.128 -48.65,92 -45.9,94.75 v1(-45.9,99.2)
  Top Layer w0.4: U7.2@-26.25,89 -26.25,89.05 -26.25,92.6 -25.6,93.25 -25.6,98.7 v1(-25.15,99.15)
  Bottom Layer w0.4: v1(-45.9,99.2) -45.45,98.75 -25.55,98.75 v1(-25.15,99.15)
P3_26: U1.26 U7.4 | length 43.1
  Top Layer w0.25: U1.26@-47.537,85.723 -48.15,86.335 -48.15,89.65 -43.3,94.5 -43.3,99.2 v1(-44.1,100)
  Top Layer w0.4: v1@-31.95,100 -31.95,99.7 -30.9,98.65 -29.5,98.65 -28.1,97.25 -28.1,93.05 -28.805,92.345 U7.4@-28.805,89.05
  Bottom Layer w0.4: v1(-44.1,100) -43.6,99.5 -32.45,99.5 v1@-31.95,100
  other v1: -31.85,100
P4_28: JP1.8 U1.82 | length 102.1
  Top Layer w0.25: U1.82@-42.941,68.399 -31.746,57.204 ; -31.75,57.2 -31.45,56.9 -31.45,54.85
  Top Layer w0.4: -31.45,54.85 -31.45,54.05 -31.05,53.65 -31.05,52.6 -30.05,51.6 -30.05,29.15 -30.8,28.4 -30.8,19.8 v1(-30.75,19.75)
  Bottom Layer w0.4: JP1.8@-77.42,17.305 -76.175,18.55 -72.3,18.55 -71.05,19.8 v1(-30.75,19.75) v1@-30.7,19.75
P4_29: R35.1 U1.85 | length 33.6
  Top Layer w0.25: U1.85@-41.88,69.459 -41.909,69.459 -41.895,69.445 -39.745,67.305 ; -39.75,67.3 -38.85,66.4 -38.85,65.05 -30.45,56.65 v1(-30.45,56.35)
  Top Layer w0.4: v1@-27.15,56.45 -27.15,56.4 -27.15,54 -27.7,53.45 -27.7,45.005 R35.1@-26.904,44.209
  Bottom Layer w0.4: v1@-30.3,56.35 v1@-27.4,56.35
  other v1: -27.25,56.4
PROG_RESET: U8.8 X37.1 | length 9.8
  Top Layer w0.4: v1(-34.85,5.95) -34.595,5.695 U8.8@-33.2,5.695
  Bottom Layer w0.4: X37.1@-41.8,8.5 -38.05,8.5 -35.5,5.95 v1(-34.85,5.95)
PROG_SET: U16.8 X29.1 | length 9.5
  Top Layer w0.4: v1(-35.6,12.1) -34.795,11.295 U16.8@-33.2,11.295
  Bottom Layer w0.4: X29.1@-41.8,13.5 -37.1,13.5 -35.7,12.1 v1(-35.6,12.1)
PWM1: JP1.22 R40.1 | length 91.5
  Top Layer w0.25: v1(-31.2,60.85) -30.9,60.85 -28.9,62.85 -28.9,66.95 -27.8,68.05 -27.8,71.5 -26.7,72.6 -26.7,76.806 R40.1@-26.303,77.203
  Top Layer w0.4: v1(-50.05,39.55) -50,39.6 -50,45.95 -50.5,46.45 -50.5,52.45 -50.9,52.85 -50.9,57.5 -49.85,58.55 -49.85,60.3 v1@-49.85,60.4
  Bottom Layer w0.4: JP1.22@-77.42,35.085 -76.715,35.085 -75.4,36.4 -72.45,36.4 -71.85,35.8 -66.85,35.8 -66.5,35.45 -61.95,35.45 -59.65,37.75 -59.65,38.75 -57.25,41.15 -53.9,41.15 -52.3,39.55 v1(-50.05,39.55) ; v1@-49.85,60.4 -49.775,60.475 -49.05,61.2 -40.25,61.2 -39.95,61.5 -33.9,61.5 -33.25,60.85 v1(-31.2,60.85)
  other v1: -49.6,60.3
PWM2: R41.1 | length 99.4
  Top Layer w0.25: v1(-32.15,61.95) -30.65,61.95 -29.35,63.25 -29.35,67.25 -28.25,68.35 -28.25,71.8 -27.25,72.8 -27.25,73.85 -29.1,75.7 R41.1@-29.1,77.15
  Top Layer w0.4: v1(-52.05,27.9) -50.95,29 -50.95,38.7 -51.1,38.85 -51.1,40.1 -50.95,40.25 -50.95,44 -51.55,44.6 -51.55,58.05 -50.75,58.85 -50.75,60.3 -51.025,60.575 v1@-51.05,60.6
  Bottom Layer w0.4: -77.42,27.465 -76.135,28.75 -74,28.75 -73.6,28.35 -69.25,28.35 -68.65,27.75 -52.1,27.75 -52.05,27.8 v1(-52.05,27.9) ; v1@-51.35,60.55 -51.15,60.75 -50,61.9 -40.75,61.9 -40.4,62.25 -33.75,62.25 -33.4,61.9 -32.2,61.9 v1(-32.15,61.95)
  other v1: -51,60.6
PWM2: JP1.16
REF: 
REF: 
RES: U1.17 U3.29 X34.1 | length 125.2
  Top Layer w0.25: U1.17@-42.234,82.894 -40.278,84.85 -39.4,84.85 -34.25,90 -33.6,90 -33.05,90.55 v1@-33.05,91.9 ; U3.29@-9.229,55.009 -7,57.238 -7,59.5 -8.1,60.6 -8.1,63.4 -4.2,67.3 -4.2,72.55 -3.6,73.15 v1(-3.6,75.6)
  Top Layer w0.4: v1@-26.25,50.65 -26.35,50.75 -26.75,51.15 -26.75,53.15 -26.2,53.7 -26.2,71.9 -23.8,74.3 v1(-23.8,75.4) ; v1@-24.75,91.5 -24.7,91.45 -23.9,90.65 -23.9,75.5 v1(-23.8,75.4) ; v1@-23.9,75.4 v1(-23.8,75.4)
  Bottom Layer w0.4: X34.1@-40,49.1 -38.8,50.3 -26.5,50.3 -26.3,50.5 -26.15,50.65 v1@-26.25,50.65 ; v1@-33.05,91.9 -33.05,91.95 -32.3,92.7 -31.4,92.7 -30.75,92.05 -29.75,92.05 -29.3,92.5 -25.55,92.5 -24.75,91.7 v1(-24.75,91.4) ; v1(-23.8,75.4) -23.55,75.15 -16.05,75.15 -7.1,75.15 -6.65,75.6 v1(-3.6,75.6) v1@-3.55,75.6
  other v1: -26.45,50.65 -33.15,91.95
RTCX1: C40.2 U1.16 Y2.1 | length 30.6
  Top Layer w0.25: U1.16@-41.88,82.541 -40.071,84.35 -39.25,84.35 -38.8,84.8 -34.9,88.7 v1(-33.35,88.7)
  Top Layer w0.4: Y2.1@-17.2,90.5 -16.103,89.403 C40.2@-16.103,88.603
  Bottom Layer w0.4: v1(-33.35,88.7) -33.3,88.7 -32.6,89.4 -20.6,89.4 -20.35,89.15 -18.45,89.15 -17.982,89.618 Y2.1@-17.15,90.45
RTCX2: 
RTCX2: C41.2 U1.18 Y2.2 | length 29.3
  Top Layer w0.25: U1.18@-42.587,83.248 -40.535,85.3 -39.65,85.3 -34.15,90.8 v1@-34.15,90.9 ; v1@-34.15,90.9 v1(-34.15,90.95) -34.1,90.9 v1@-34.15,90.9
  Top Layer w0.4: Y2.2@-19.7,90.5 -19.7,91.1 -18.403,92.397 C41.2@-18.403,92.597 C41.2@-18.353,92.597
  Bottom Layer w0.4: v1(-34.15,90.95) -33.45,90.25 -20,90.25 Y2.2@-19.75,90.5
RX0: U16.6 X25.1 | length 9.5
  Top Layer w0.4: v1(-35.1,14.3) -34.635,13.835 U16.6@-33.2,13.835
  Bottom Layer w0.4: X25.1@-41.8,16 -37.85,16 -36.15,14.3 v1(-35.1,14.3)
RXCAN: JP1.24
RXCAN: 
TD1: 
TX0: R43.1 X45.1 | length 4.4
  Top Layer w0.4: X45.1@-41.8,3.5 -41.45,3.5 -38.75,6.2 R43.1@-38.6,6.2 R43.1@-38.5,6.2
U1: JP1.1 R20.2 | length 8.5
  Top Layer w0.4: v1(-68.3,9.6) -67.65,9.6 -66.828,10.422 R20.2@-66.75,10.5
  Bottom Layer w0.4: JP1.1@-74.88,9.685 -68.385,9.685 v1(-68.3,9.6)
U2: 
U2: 
U2: 
U2: 
U2: 
U2: 
U2: 
U2: 
U2: 
U2: 
U2: JP1.17 R21.2 | length 8.4
  Top Layer w0.4: v1(-68.15,28.85) -68.1,28.9 R21.2@-66.95,28.9
  Bottom Layer w0.4: JP1.17@-74.88,30.005 -74.055,30.005 -73.15,29.1 -68.45,29.1 -68.2,28.85 v1(-68.15,28.85)
UAKB: 
UAKB: 
UAKB: 
UAKB: 
UAKB: 
UAKB: 
UAKB: 
UAKB: 
UAKB: 
UAKB: 
UAKB: 
UAKB: 
UAKB: 
UAKB: 
UAKB: 
UAKB: 
UAKB: 
UAKB: 
UAKB: 
UAKB: 
UAKB: 
UAKB: 
UAKB: 
UAKB: 
UAKB: 
UAKB: 
UAKB: 
UAKB: 
UAKB: 
UAKB: JP1.5 R22.2 | length 8.4
  Top Layer w0.4: v1(-68.25,14.85) -67.749,14.85 R22.2@-66.903,15.697
  Bottom Layer w0.4: JP1.5@-74.88,14.765 -68.285,14.765 -68.25,14.8 v1(-68.25,14.85)
UIB: C25.2 R66.2 R67.1 U4.1 | length 63.8
  Top Layer w0.4: v1@-76.35,61.2 v1@-76.175,61.375 ; v1(-76.15,61.35) -76,61.5 -76,68.65 -75.25,69.4 -75.25,70.603 R67.1@-75.25,70.7 ; v1@-60.2,60.15 -60.125,60.075 -59.85,59.8 -59.85,58.025 -59.85,56 -58,54.15 -58,47.9 -59.05,46.85 v1(-59.05,46.4) ; C25.2@-44.1,46 -44.093,46.007 -44.009,46.007 v1(-42.6,46.007) R66.2@-41.187,46.007
  Bottom Layer w0.4: v1@-76.35,61.2 -76.5,61.05 -76.5,59.8 -75.7,59 -74.6,59 -74.15,59.45 -69.5,59.45 -68.8,58.75 -63.65,58.75 -62.3,60.1 v1(-60.1,60.1) ; v1(-59.05,46.4) -58.656,46.007 v1(-42.6,46.007)
US1: JP1.10 R25.2 | length 25.9
  Top Layer w0.25: v1(-71.8,21) v1@-71.8,21.05
  Top Layer w0.4: v1(-72.35,34.55) -71.85,34.05 -71.85,26.55 -72.05,26.35 -72.05,24.95 -71.85,24.75 v1@-71.85,21.1 ; v1(-67.8,34.6) -66.903,34.6 -66.9,34.6 -66.75,34.45 -66.7,34.4 R25.2@-66.65,34.4
  Bottom Layer w0.4: JP1.10@-77.42,19.845 -76.165,21.1 -71.85,21.1 -71.8,21.05 v1(-71.8,21) ; v1(-72.35,34.55) -67.85,34.55 v1(-67.8,34.6)
US1: 
US1: 
US1: 
US1: 
US1: 
US1: 
US1: 
US1: 
US1: 
US1: 
US1: 
US1: 
US1: 
US1: 
US1: 
US1: 
US1: 
US1: 
US1: 
US1: 
US1: 
US1: 
US1: 
US1: 
US1: 
US1: 
US1: 
US1: 
US1: 
US1: 
US1: 
US1: 
US1: 
UU1: C1.1 R12.1 R20.1 U4.15 | length 50.5
  Top Layer w0.4: R12.1@-61.197,10.503 -59.8,11.9 -59.8,38.1 -61.3,39.6 -61.3,41.5 -61.85,42.05 -61.85,46.9 -61.25,47.5 -60.55,47.5 -59.8,48.25 -59.8,48.9 -60.161,49.261 -61.125,50.225 U4.15@-61.125,52.175
  Top Layer w0.5: R20.1@-64.103,10.497 -61.303,10.497 -61.25,10.55 -61.25,10.6 -61.2,10.55 -61.2,10.503 C1.1@-61.2,7.95
UU2: C2.1 R13.1 R21.1 U4.13 | length 53.5
  Top Layer w0.4: R21.1@-64.103,28.897 v1(-62.65,28.897) -61.203,28.897 R13.1@-61.197,28.903 -61.15,28.95 -61.15,31.6 -61.175,31.625 C2.1@-61.2,31.65 ; U4.13@-63.675,52.175 U4.13@-63.665,52.175 -63.665,51.015 -63.25,50.6 -63.25,49.55 -62.55,48.85 -62.55,38.95 -62.425,38.825 -62.4,38.8 v1(-62.4,38.85) ; v1(-52,30.2) -51.95,30.25 v1(-51.95,40.7)
  Bottom Layer w0.4: v1(-62.65,28.897) -61.347,30.2 v1(-52,30.2) ; v1(-62.4,38.85) -60.7,38.85 -57.75,41.8 -53.6,41.8 -52.8,41 -52.2,41 v1@-51.95,40.75 ; v1@-51.975,40.725 v1(-51.95,40.7)
VBAT: U1.19 X30.1 | length 109.4
  Top Layer w0.25: U1.19@-42.941,83.601 -40.792,85.75 -39.9,85.75 -35.1,90.55 -35.1,91.5 -34.5,92.1 -33.6,93 v1@-30.3,93
  Top Layer w0.4: X30.1@-37.5,49.1 -37.1,49.5 -37.1,53.15 -36.55,53.7 -36.5,53.75 -36.5,53.8 -36.4,53.7 v1(-36.4,53.55) ; v1(-20.2,57.1) -20.55,57.45 -20.55,67.45 -19.65,68.35 -19.65,72.2 v1(-19.35,72.5) ; v1(-12.35,92.9) -12.35,81.95 -11.1,80.7 -11.1,79.5 -10.697,79.097 -9.697,79.097 -8.5,77.9 v1(-8.5,72.35) v1@-8.5,72.3
  Bottom Layer w0.4: v1(-36.4,53.55) -36.1,53.25 -33.8,53.25 -33.216,53.834 -32.75,54.3 -27.35,54.3 -25.85,55.8 -20.8,55.8 -20.15,56.45 v1@-20.15,57.1 ; v1@-30.2,92.9 -30.3,93 -30.25,93.05 -29.85,93.45 -24.85,93.45 -24.3,92.9 v1(-12.35,92.9) ; v1(-19.35,72.5) -19,72.85 -9,72.85 v1(-8.5,72.35)
  other v1: -30.3,93.1
VS: JP1.25 R71.1 | length 4.9
  Bottom Layer w0.4: JP1.25@-74.88,40.165 -70.315,40.165 R71.1@-70.1,39.95
VS: 
VS: 
VS: 
VS: 
VS: 
VS: 
VS: 
VS: 
VS: 
VS: 
VS: 
VS: 
VS: 
VS: 
VS: 
VS: 
VS: 
VS: 
VS: 
VS: 
VS: 
VS: 
VS: 
VS: 
VS: 
VS: 
VS: 
VS: 
VS: 
VS: 
XTAL1: C21.2 U1.22 Y1.1 | length 24.7
  Top Layer w0.25: U1.22@-44.002,84.662 -41.7,86.964 -41.7,87.216 -40.915,88 -40.664,88 -35.164,93.5 -34.2,93.5 -33.2,94.5 -33.2,97.25 -34.75,98.8 -34.75,101.644 C21.2@-34.697,101.697 -34.294,102.1 Y1.1@-33.35,102.1 ; C21.2@-34.7,102.2 C21.2@-34.6,102.1 ; Y1.1@-33.4,102.05 Y1.1@-33.35,102.1 ; Y1.1@-33.325,102.075 Y1.1@-33.35,102.1 ; Y1.1@-33.3,102.1 Y1.1@-33.35,102.1
XTAL2: C31.2 U1.23 Y1.2 | length 22.2
  Top Layer w0.25: U1.23@-44.355,85.016 -42.6,86.771 -42.6,87.05 -35.75,93.9 -35.75,99.15 -37.05,100.45 -37.05,101.65 -37.45,102.05 Y1.2@-38.25,102.05 ; Y1.2@-38.336,102.05 -38.336,102.064 Y1.2@-38.3,102.1 ; C31.2@-37.1,102.1 C31.2@-37.05,102.15
pads on no net: J2.1 J2.6 J2.8 J2.9 J2.10 J2.11 J301.0 J301.7 JP1.9 JP6.4 JP700.4 U1.1 U1.2 U1.3 U1.4 U1.5 U1.14 U1.44 U1.45 U1.50 U1.51 U1.52 U1.56 U1.63 U1.66 U1.67 U1.68 U1.81 U1.100 U2.7 U2.8 U3.1 U3.5 U3.6 U3.8 U3.9 U3.10 U3.11 U3.12 U3.25 U3.33 U3.38 U3.42 U3.45 U3.46 U6.1 U7.1 U7.8 U8.3 U8.4 U8.5 U8.6 U9.1 U9.5 U9.8 U10.3 U14.11 U14.12 U14.13 U14.14 U15.3 U15.4 U15.5 U15.6 U19.4 U701.4 U701.8 X32.1 X38.1 X46.1
copper on no net: | length 0.4
  Bottom Layer w0.5: -81.85,-36.5 -81.4,-36.5
  other v3: 7.35,7.5 88.5,7.5 7.35,8.85 88.5,8.85 88.5,29.8 88.5,31.1 88.45,61.45 88.45,62.8 88.5,92.25 7.35,92.55 88.5,93.55 7.35,93.85

## Polygon pours and split planes (outlines as drawn)
GND on Top Layer (hatched 90Degree grid 0.1 track 0.3, remove dead copper): -84.6,108.1 -84.6,-6.15 -42.25,-6.15 -42.25,2.95 -35.3,2.95 -35.3,-0.15 -31.4,-0.15 -31.4,18.55 7.7,18.55 7.7,108.5 -84.6,108.5
GND on Top Layer (hatched 90Degree grid 0.1 track 0.3, remove dead copper): -66.93,107.95 -33.713,76.05 -46.25,63.514 -59.186,76.45 -58.236,76.45 -46.436,88.25 -45.913,88.25
GND on Top Layer (hatched 90Degree grid 0.1 track 0.3, remove dead copper): -20.536,53.05 -12.7,45.214 -5.165,52.749 -5.754,53.191 -12.232,59.668 -12.15,59.586 -12.15,60.536 -19.636,53.05
NetJ2_5 on Top Layer (hatched 90Degree grid 0.1 track 0.2, remove dead copper): 88.55,72.4 88.55,52 121.35,52 121.35,71.55 88.55,71.55
+3V3 on Top Layer (hatched 90Degree grid 0.1 track 0.3, remove dead copper): -6.05,52.85 -12.55,59.35 -12.6,59.4 -12.6,59.45 -19.45,52.6 -12.9,46.05 -12.8,45.95 -12.7,45.85 -5.85,52.7
+3V3 on Top Layer (hatched 90Degree grid 0.1 track 0.3, remove dead copper): -34.65,76.35 -46.1,87.8 -46.25,87.8 -57.9,76.15 -58.05,76 -58.1,76 -46.35,64.25 -46.25,64.15 -34.35,76.05 -34.75,76.45
-5V_IZ on Top Layer (hatched 90Degree grid 0.1 track 0.3, remove dead copper): 6.6,17.3 -30.1,17.3 -30.1,-1.4 -36.6,-1.4 -36.6,1.6 -40.7,1.6 -40.7,-5.6 6.15,-5.6 6.15,17.3
GND_P on Top Layer (hatched 90Degree grid 0.1 track 0.3, remove dead copper): 7.855,98.5 13.705,98.5 13.705,71 6.455,71 6.455,98.45 7.955,98.45
GND_P on Top Layer (hatched 90Degree grid 0.1 track 0.3, remove dead copper): 8.505,73.55 47.955,73.55 47.955,68.239 49.455,66.829 49.455,42.812 7.405,42.812 7.405,73.55 9.305,73.55 9.305,73.503
NetC34_1 on Top Layer (hatched 90Degree grid 0.1 track 0.3, remove dead copper): 89.15,48.45 135.05,48.45 135.05,35.25 130.25,35.25 130.25,-5.45 89.2,-5.45 89.2,48.45
GND_P on Bottom Layer (hatched 90Degree grid 0.1 track 0.3, remove dead copper): 24.806,7.5 24.806,-7.5 85.35,-7.5 85.35,108.05 10.2,108.05 10.2,42.8 40.003,42.8 40.003,7.55 24.756,7.55
GND on Bottom Layer (hatched 90Degree grid 0.1 track 0.3, remove dead copper): -83.65,107.35 -83.65,-4.85 -42.2,-4.85 -42.2,2.95 -35.3,2.95 -35.3,-0.1 -31.35,-0.1 -31.35,18.3 6.45,18.3 6.45,107.5 -83.65,107.5
NetJ2_5 on Bottom Layer (hatched 90Degree grid 0.1 track 0.2, remove dead copper): 89.1,72 89.1,52.2 121.3,52.2 121.3,71.95 89.2,71.95
+5V_IZ on Bottom Layer (hatched 90Degree grid 0.1 track 0.3, remove dead copper): -36.65,1.55 -40.7,1.55 -40.7,-5.55 6.5,-5.55 6.5,17.3 -30.1,17.3 -30.1,-1.4 -36.6,-1.4 -36.6,1.6
NetC34_1 on Bottom Layer (hatched 90Degree grid 0.1 track 0.3, remove dead copper): 89.25,48.3 89.25,-5.3 132.9,-5.3 132.9,34.7 135.1,34.7 135.1,49.05 89.25,49.05 89.25,47.45 89.2,47.45

## Keep-outs
Keep-Out Layer:
  circle w0.3: c122.55,-3.8 r0
  lines w0.25: 8.855,0.25 8.855,-4 ; 123.95,-0.35 126.25,-0.35 ; 126.3,-0.35 126.3,2.7 ; 126.35,2.7 131.5,2.7 131.5,10.8 126.1,10.8 126.1,12.85 129.5,12.85 ; 129.5,12.9 129.5,36 ; 8.855,-4 86.305,-4 8.855,-4
  lines w0.254: -27.75,21.95 -27.75,24.95 ; 3.75,21.95 3.75,24.95 ; 5.844,96.15 ccw(c7.347,96.15) 8.85,96.15 ; 5.85,5.2 cw(c7.354,5.2) 8.857,5.2 ; 5.85,11.2 ccw(c7.354,11.2) 8.857,11.2 ; 5.85,90.2 cw(c7.354,90.2) 8.857,90.2 ; 86.95,65.15 ccw(c88.454,65.15) 89.957,65.15 ; 86.994,33.5 ccw(c88.497,33.5) 90,33.5 ; 86.994,59.15 cw(c88.497,59.15) 90,59.15 ; 86.994,89.95 cw(c88.497,89.95) 90,89.95 ; 86.994,95.9 ccw(c88.497,95.9) 90,95.9 ; 87,5.2 cw(c88.504,5.2) 90.007,5.2 ; 87,11.15 ccw(c88.5,11.15) 90,11.15 ; 87,27.45 cw(c88.504,27.45) 90.007,27.45 ; 111.937,70.399 ccw(c117.55,70.437) 117.55,64.824
  lines w0.3: -27.7,21.95 -21.95,21.95 -21.95,20 ; -27.7,24.95 -22,24.95 ; -22,20 -2,20 -2,21.95 3.7,21.95 ; -22,25 -22,40.5 -12,40.5 ; -12.05,40.5 -2,40.5 -2,24.95 ; -1.95,24.95 3.7,24.95 ; 5.8,5.65 5.8,-4 -82.8,-4 -82.8,106.5 5.8,106.5 5.8,86 ; 5.8,11 5.8,90.45 ; 8.85,-3.957 8.85,5.2 ; 8.857,-3.957 8.9,-4 86.95,-4 ; 8.9,11.15 8.9,90.25 ; 8.95,96.15 8.95,106.5 86.95,106.5 86.95,96 ; 86.95,11 86.95,27.55 ; 86.95,33.5 86.95,59.15 ; 86.95,65.3 86.95,90 ; 90.007,-3.957 90.007,5.2 ; 90.007,-3.957 90.05,-4 120.35,-4 ; 90.05,11 90.05,27.5 ; 90.05,12.543 90.05,13.3 ; 90.05,59.1 90.05,53.45 121.05,53.45 121.05,64.812 121.012,64.85 117.6,64.85 ; 90.05,65.3 90.05,70.45 112,70.45 ; 90.05,89.95 90.05,80.95 121.05,80.95 121.05,106.5 90.1,106.5 ; 90.05,96 90.05,106.5 ; 90.1,33.5 90.1,47.55 ; 90.15,47.55 133.85,47.55 ; 118.9,55.55 118.95,55.6 ; 120.1,-4 122.55,-4 ; 122.55,-3.8 122.55,-1.62 cw(c123.82,-1.62) 123.82,-0.35 ; 129.5,36.05 133.85,36.05 133.85,47.6 ; 86.95,-4 86.95,5.2 ; 86.95,-4 86.95,-4 ; 86.95,5.2 86.95,5.2 ; 86.95,98.45 86.95,98.45

## Other copper
Top Layer:
  text "202045" at 115.9,82.7 h1.52 r90
  text "202045" at 100.2,68.8 h1.52 r180
  text "202045" at 109.35,43.6 h1.52
Bottom Layer:
  text "20204" at -73.3,0.25 h1.52

## Silkscreen, mask and mechanical layers (free items; w line width, h text height)
Top Overlay:
  lines w0.254: -77.5,68.05 -77.5,70.65 ; -77.455,61.388 -77.455,63.988 ; 91.8,31.3 91.8,33.9
Bottom Overlay:
  lines w0.254: -77.6,85.6 -77.6,88.2 ; -77.453,44.4 -77.453,47
Mechanical 1:
  lines w0.25: 65.895,0.35 82.355,0.35 65.895,0.35 ; 65.895,0.35 64.055,-1.49 65.895,0.35
  lines w0.3: -23.7,20.05 -23.7,26.8 ; -0.4,20.05 -0.4,26.8 ; 8.855,41.15 86.355,41.15 ; 8.905,38.5 86.355,38.5 ; 90.55,92.45 125.4,92.45 ; 90.55,93.95 125.4,93.95 ; -26.2,20.05 -26.2,26.8 2.1,26.8 2.1,20.05 2.05,20.05 -26.2,20.05
Mechanical 3:
  lines w0.25: -51.44,-1.96 -49.75,-1.96 -49.75,-3.57
  lines w0.3: 91.4,92.85 91.4,99.6 119.7,99.6 119.7,92.85 ; 93.9,92.85 93.9,99.6 ; 104.4,-1.6 104.4,45.7 ; 117.2,92.85 117.2,99.6

## Dimensions
131.5,10.8 to 131.5,2.7 on Mechanical 1

## Text inside footprints (layer, text, board x,y; h text height)
JP6: Bottom Overlay "10" at -38.116,-1.532 h1 r180; Bottom Overlay "9" at -38.116,1.008 h1 r180; Bottom Overlay "1" at -51.832,1.008 h1 r180; Bottom Overlay "2" at -52.34,-1.532 h1 r180
Q701: Top Overlay "1" at 24.153,86.829 h1.5; Top Overlay "3" at 28.975,86.829 h1.5